# Altium PCB final.PcbDoc
Units mm, origin at the board's own origin, x right, y up, seen from the top; angles counter-clockwise.
Board outline 152.4 x 101.6 mm, 2 copper layers (Top Layer, Bottom Layer); 11 components, 17 nets, 65 pads, 0 vias.
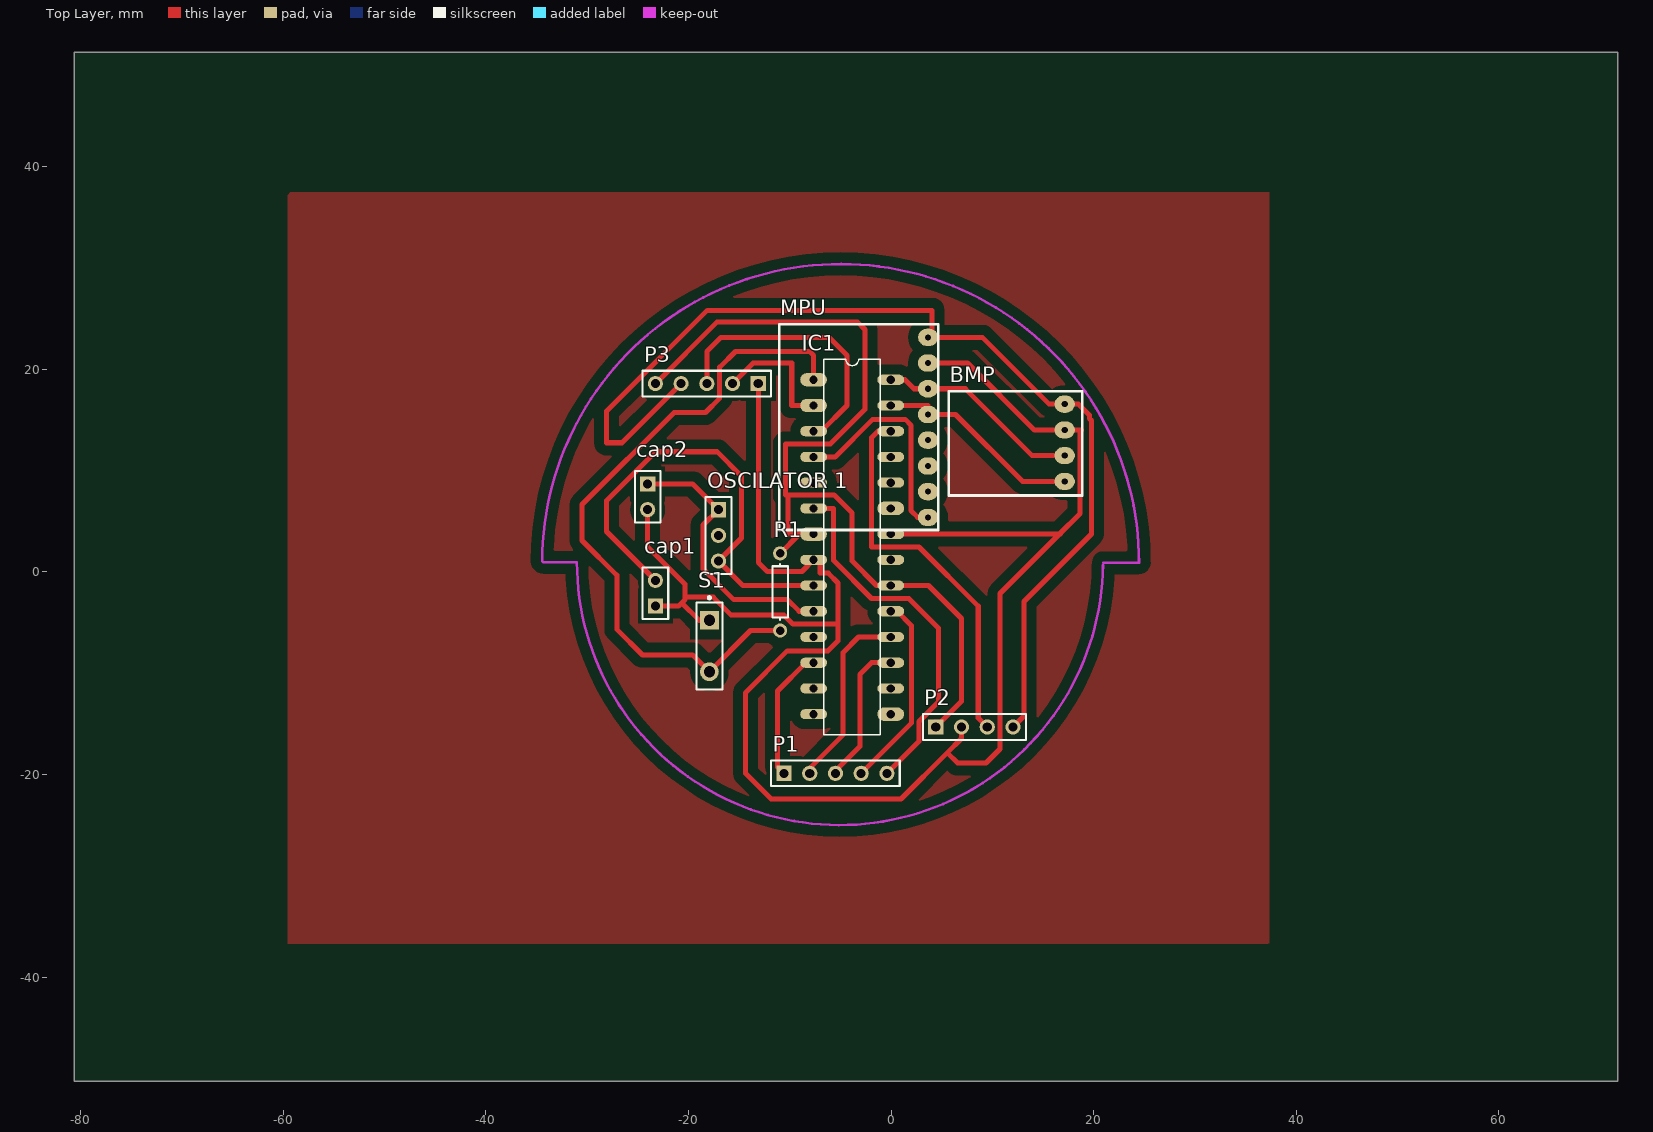
[diagram p0: Top Layer view]
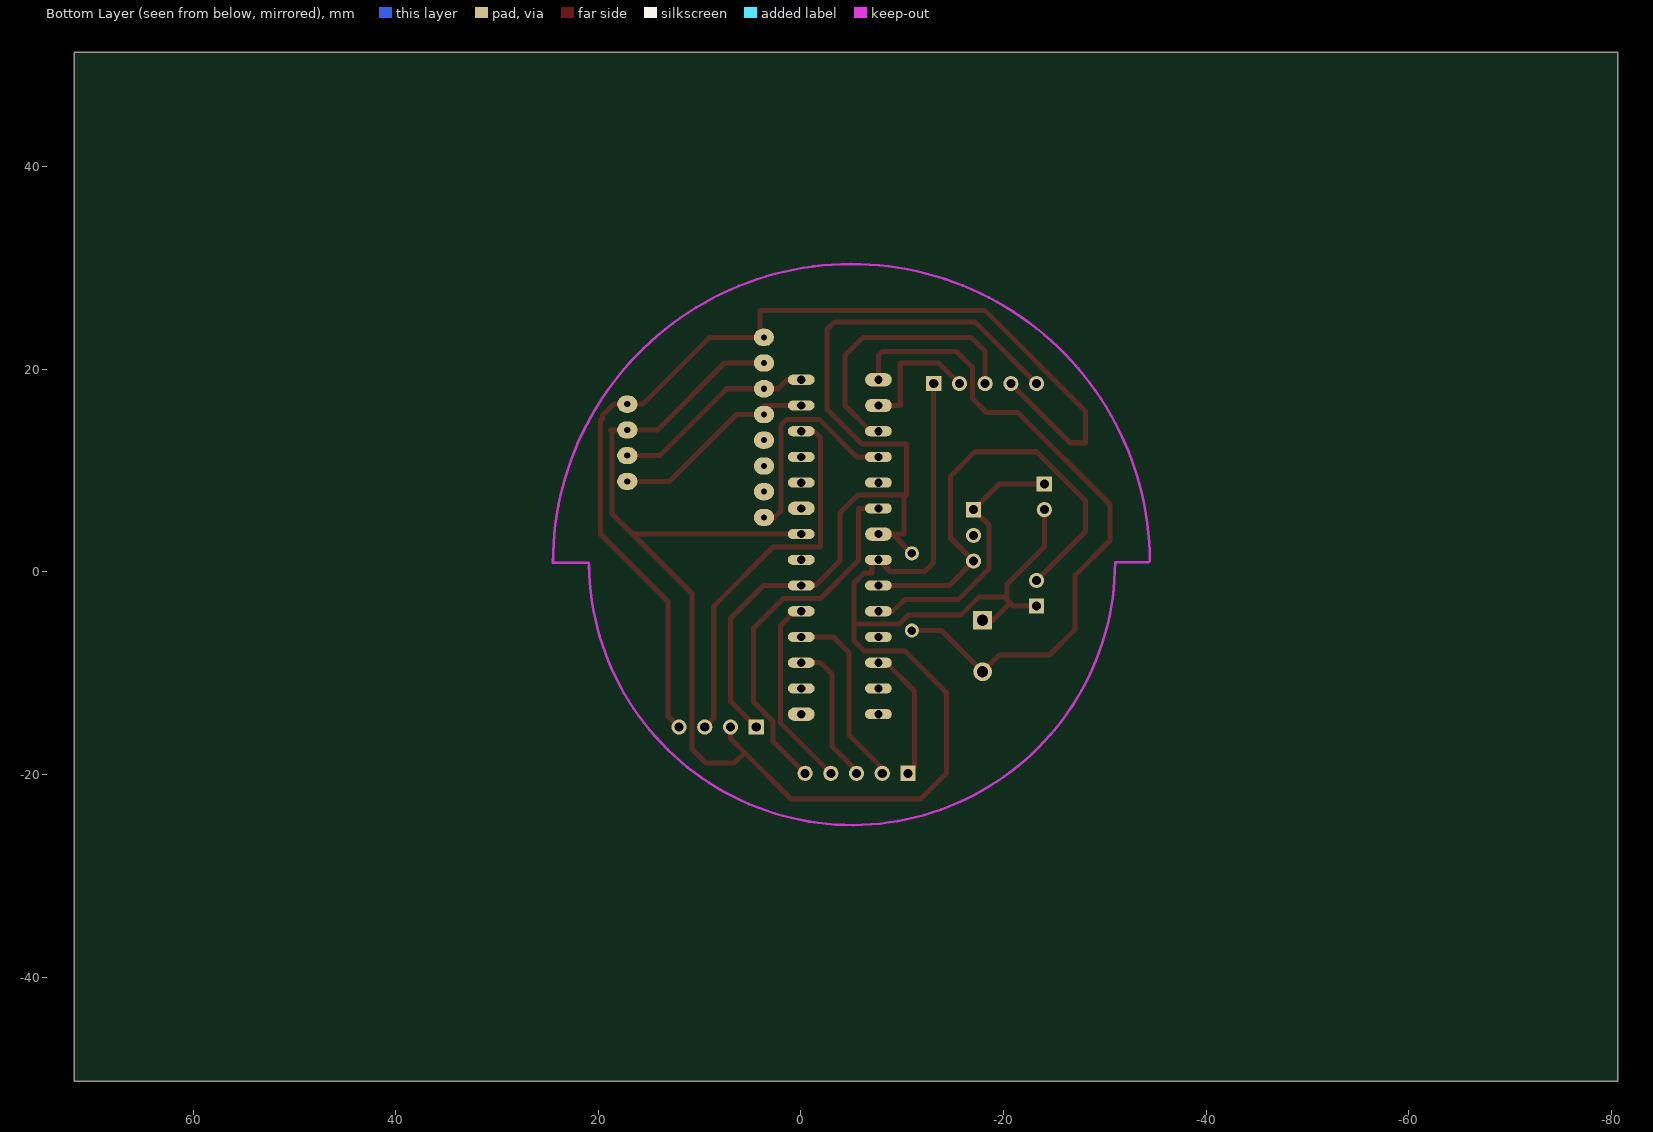
[diagram p1: Bottom Layer view, seen from below]

## Layer stack, top to bottom
Top Solder: solder mask 0.0102, Solder Resist, Dk 3.5
Top Layer: signal copper 0.0356
Dielectric 1: dielectric 0.32, FR-4, Dk 4.8
Bottom Layer: signal copper 0.0356
Bottom Solder: solder mask 0.0102, Solder Resist, Dk 3.5

## Board outline
-80.645,-50.292 71.755,-50.292 71.755,51.308 -80.645,51.308

## Design rules (kind name [scope] priority, off if disabled: settings)
Clearance [All] p1: gap=0.254 ignorepadtopadclearanceinfootprint=FALSE except(0: Arc-Hole Track-Hole SMDPad-Hole THPad-Hole Via-Hole Fill-Hole Poly-Hole Region-Hole Text-Hole; 1: Arc-Fill Arc-Poly Arc-Region Track-Fill Track-Poly Track-Region SMDPad-Fill SMDPad-Poly SMDPad-Region THPad-Fill THPad-Poly THPad-Region Via-Fill Via-Poly Via-Region Fill-Fill Fill-Poly Fill-Region Poly-Poly Poly-Region Region-Region)
PolygonConnect [All] p1: connectstyle=Relief reliefconductorwidth=0.254 reliefentries=4 polygonreliefangle="90 Angle" airgapwidth=0.254
RoutingLayers [All] p1: top layer_v5=TRUE bottom layer_v5=FALSE
RoutingVias [All] p1: holewidth=0.711 width=1.27 viastyle="Through Hole" minholewidth=0.711 minwidth=1.27 maxholewidth=0.711 maxwidth=1.27
SolderMaskExpansion [All] p1: expansion=0.102
Width [All] p1: maxlimit=0.7 minlimit=0.254 preferedwidth=0.5 toplayer_minwidth=0.5 bottomlayer_maxwidth=0.254 bottomlayer_prefwidth=0.254 minimp=50.000000 maximp=50.000000 favimp=50.000000
29 further rules are at their usual default settings.

## Classes and differential pairs
component class "MIDDLE LAYER": BMP cap1 cap2 MPU "OSCILATOR 1" P1 P2 P3 R1 S1

## Components (designator, comment, footprint, x,y, rotation, side; value= is the part's Value field where it differs from the comment)
BMP "BMP" BMP 12.294,12.751 r90 top
cap1 "Header 2" HDR1X2 -23.266,-3.378 r90 top
cap2 "Header 2" HDR1X2 -24.028,8.687 r270 top
IC1 "ATMEGA328-PU" *DIL28 -3.835,2.464 r0 top
MPU "MPU" MPU -11.042,24.435 r90 top
"OSCILATOR 1" "Header 3" HDR1X3 -17.043,6.147 r270 top
P1 "Header 5" HDR1X5 -10.566,-19.888 r0 top
P2 "Header 4" HDR1X4 4.42,-15.316 r0 top
P3 "Header 5" HDR1X5 -13.106,18.593 r180 top
R1 "Res1" AXIAL-0.3 -10.947,-1.981 r90 top value=1K
S1 "SW-PB" SPST-2 -17.932,-7.315 r270 top

## Footprints (in the part's own frame and the unit in brackets; to place one, negate y for a bottom-side part, rotate by r counter-clockwise, add the part's x,y. Pads: shape width x height; smd on the part's side, far side on the other; paste and mask are expansions set on the pad)
*DIL28 [mil]
  oval 104x52 hole 32: 1(-150,650) 2(-150,550) 7(-150,50) 15(150,-650) 23(150,150)
  oval 104x39.37 hole 32: 3(-150,450) 4(-150,350) 5(-150,250) 6(-150,150) 8(-150,-50) 9(-150,-150) 10(-150,-250) 11(-150,-350) 12(-150,-450) 13(-150,-550) 14(-150,-650) 16(150,-550) 17(150,-450) 18(150,-350) 19(150,-250) 20(150,-150) 21(150,-50) 22(150,50) 24(150,250) 25(150,350) 26(150,450) 27(150,550) 28(150,650)
  silkscreen extent -110,-730 110,730
AXIAL-0.3 [mm] "Axial Device, Thru-Hole; 2 Leads; 0.3 in Pin Spacing"
  round 1.4 hole 0.85: 1(-3.81,0) 2(3.81,0)
  silkscreen extent -2.77,-0.76 2.77,0.76
BMP [mm]
  oval 1.7x2 hole 0.6: 28(-3.81,-4.858) 29(-1.27,-4.858) 30(1.27,-4.858) 31(3.81,-4.858)
  silkscreen extent -5.21,-6.6 5.09,6.6
HDR1X2 [mm] "Connector; Header; 2 Position"
  rect 1.5x1.5 hole 0.9: 1(0,0)
  round 1.5 hole 0.9: 2(2.54,0)
  silkscreen extent -1.27,-1.27 3.81,1.27
HDR1X3 [mm] "Connector; Header; 3 Position"
  rect 1.5x1.5 hole 0.9: 1(0,0)
  round 1.5 hole 0.9: 2(2.54,0) 3(5.08,0)
  silkscreen extent -1.27,-1.27 6.35,1.27
HDR1X4 [mm] "Connector; Header; 4 Position"
  rect 1.5x1.5 hole 0.9: 1(0,0)
  round 1.5 hole 0.9: 2(2.54,0) 3(5.08,0) 4(7.62,0)
  silkscreen extent -1.27,-1.27 8.89,1.27
HDR1X5 [mm] "Connector; Header; 5 Position"
  rect 1.5x1.5 hole 0.9: 1(0,0)
  round 1.5 hole 0.9: 2(2.54,0) 3(5.08,0) 4(7.62,0) 5(10.16,0)
  silkscreen extent -1.27,-1.27 11.43,1.27
MPU [mm]
  oval 1.7x2 hole 0.6: 1(-19.05,-14.7) 2(-16.51,-14.7) 3(-13.97,-14.7) 4(-11.43,-14.7) 5(-8.89,-14.7) 6(-6.35,-14.7) 7(-3.81,-14.7) 8(-1.27,-14.71)
  silkscreen extent -20.3,-15.7 0,0
SPST-2 [mm] "Switch; 2 Leads"
  rect 1.85x1.85 hole 1.1: 1(-2.54,0)
  round 1.85 hole 1.1: 2(2.54,0)
  silkscreen extent -4.89,-1.27 4.28,1.27

## Part data
cap1 cap2: "Header, 2-Pin", LatestRevisionDate=17-Jul-2002, LatestRevisionNote="Re-released for DXP Platform.", Publisher="Altium Limited"
IC1: "ATmega Series 20 MHz 32 KB Flash 2 KB SRAM 8-Bit Microcontroller - DIP-28", Package="PDIP-28 Microchip", Availability=Unavailable, MF=Microchip, MP=ATMEGA328-PU, Price=None, SnapEDA_Link=https://www.snapeda.com/parts/ATMEGA328-PU/Microchip/view-part/?ref=snap
"OSCILATOR 1": "Header, 3-Pin", LatestRevisionDate=17-Jul-2002, LatestRevisionNote="Re-released for DXP Platform.", Publisher="Altium Limited"
P1 P3: "Header, 5-Pin", LatestRevisionDate=17-Jul-2002, LatestRevisionNote="Re-released for DXP Platform.", Publisher="Altium Limited"
P2: "Header, 4-Pin", LatestRevisionDate=17-Jul-2002, LatestRevisionNote="Re-released for DXP Platform.", Publisher="Altium Limited"
R1: "Resistor", LatestRevisionDate=17-Jul-2002, LatestRevisionNote="Re-released for DXP Platform.", PackageDescription="Axial Device, Thru-Hole; 2 Leads; 0.3 in Pin Spacing", PackageReference=AXIAL-0.3, Published=8-Jun-2000, Publisher="Altium Limited"
S1: "Switch", LatestRevisionDate=17-Jul-2002, LatestRevisionNote="Re-released for DXP Platform.", PackageDescription="Switch; 2 Leads", PackageReference=SPST-2, Published=24-Mar-1999, Publisher="Altium Limited"

## Nets (pads, with @x,y where several pads share a name; then routed paths per layer and width w, separated by ;. In a path a pad name is that pad's centre, name@x,y a point inside that pad or via, vN(x,y) a via of type N, cw(c..) or ccw(c..) an arc to the next point about the centre after c; other vN are vias at no path point)
NetBMP_28: BMP.28 IC1.27 MPU.5 | length 20.8
  Top Layer w0.5: IC1.27 3.658,16.434 MPU.5 6.375,15.545 12.979,8.941 BMP.28
NetBMP_29: BMP.29 IC1.28 MPU.6 | length 20.3
  Top Layer w0.5: IC1.28 1.372,18.974 2.261,18.085 MPU.6 7.341,18.085 13.945,11.481 BMP.29
NetBMP_30: BMP.30 cap1.1 cap2.2 IC1.8 IC1.22 MPU.7 P2.2 P3.1 S1.1 | length 188
  Top Layer w0.5: cap2.2 -24.028,2.464 -20.345,-1.219 -20.345,-2.489 ; cap1.1 -20.98,-3.378 -20.663,-3.061 ; S1.1 -18.948,-4.775 -20.663,-3.061 ; P3.1 -13.106,0.94 -12.217,0.051 -8.788,0.051 IC1.8 -6.985,1.194 -6.985,-0.127 -6.198,-0.127 -5.232,-1.092 -5.232,-5.156 ; IC1.22 16.637,3.734 ; MPU.7 7.544,20.625 14.148,14.021 BMP.30 18.821,14.021 18.644,13.843 18.644,12.054 18.656,12.042 18.656,10.92 18.644,10.908 18.644,9.514 18.656,9.502 18.656,5.752 16.637,3.734 ; P2.2 6.96,-16.459 5.563,-17.856 ; 16.739,3.734 16.637,3.734 ; -20.663,-3.061 -20.345,-2.743 -20.345,-2.489 ; -20.345,-2.489 -17.551,-2.489 -15.773,-4.267 -10.566,-4.267 -9.677,-5.156 -5.232,-5.156 ; -5.232,-5.156 -5.232,-6.807 -6.223,-7.798 -10.236,-7.798 -14.376,-11.938 -14.376,-19.888 -11.836,-22.428 0.991,-22.428 5.563,-17.856 ; 5.563,-17.856 6.579,-18.872 9.373,-18.872 10.77,-17.475 10.77,-2.134 16.637,3.734
NetBMP_31: BMP.31 MPU.8 P2.4 P3.4 | length 105.2
  Top Layer w0.5: P3.4 -26.568,12.751 -28.092,12.751 -28.092,15.875 -18.136,25.832 4.044,25.832 4.044,23.542 MPU.8 9.013,23.165 15.617,16.561 BMP.31 18.517,16.561 19.603,15.474 19.603,15.134 19.787,14.951 19.787,3.734 13.132,-2.921 13.132,-14.224 P2.4
Netcap1_2: "OSCILATOR 1.3" cap1.2 IC1.9 | length 45.9
  Top Layer w0.5: cap1.2 -28.092,3.988 -28.092,7.036 -23.266,11.862 -17.17,11.862 -14.757,9.449 -14.757,3.353 -17.043,1.067 -14.63,-1.346 IC1.9
Netcap2_1: "OSCILATOR 1.1" cap2.1 IC1.10 | length 27.2
  Top Layer w0.5: cap2.1 -19.583,8.687 -17.043,6.147 -18.567,4.623 -18.567,0.305 -15.519,-2.743 -10.211,-2.743 -9.068,-3.886 IC1.10
NetIC1_1: IC1.1 R1.1 S1.2 | length 66.8
  Top Layer w0.5: R1.1 -13.868,-5.791 S1.2 -19.583,-8.204 -24.536,-8.204 -27.076,-5.664 -27.076,-0.33 -30.505,3.099 -30.505,6.655 -21.412,15.748 -18.313,15.748 -16.916,17.145 -16.916,20.218 -15.367,21.768 -8.026,21.768 -7.645,21.387 IC1.1
NetIC1_2: IC1.2 P3.2 | length 13
  Top Layer w0.5: P3.2 -13.614,20.625 -9.804,20.625 -9.804,16.434 IC1.2
NetIC1_3: IC1.3 P3.3 | length 27.6
  Top Layer w0.5: P3.3 -18.186,21.768 -16.789,23.165 -6.121,23.165 -4.343,21.387 -4.343,16.434 -6.883,13.894 IC1.3
NetIC1_4: IC1.4 MPU.1 | length 21.8
  Top Layer w0.5: IC1.4 -5.512,11.354 -1.803,15.062 1.397,15.062 1.981,14.478 1.981,6.045 2.642,5.385 MPU.1
NetIC1_6: IC1.6 P1.5 | length 36.7
  Top Layer w0.5: IC1.6 -5.664,6.274 -5.664,1.118 -1.93,-2.616 1.753,-2.616 4.674,-5.537 4.674,-12.849 2.761,-14.762 2.761,-16.721 P1.5
NetIC1_7: IC1.7 IC1.20 P2.1 P3.5 R1.2 | length 92.6
  Top Layer w0.5: P3.5 -17.17,24.689 -3.327,24.689 -2.565,23.927 -2.565,16.053 -5.994,12.624 -10.439,12.624 -10.439,7.595 -10.185,7.595 ; R1.2 -9.042,3.734 ; IC1.7 -9.042,3.734 ; P2.1 P2.1@4.92,-14.816 ; P2.1@4.42,-15.066 4.42,-14.816 4.67,-14.816 P2.1@4.92,-14.816 ; -10.185,7.595 -5.613,7.595 -3.835,5.817 -3.835,1.067 -1.422,-1.346 IC1.20 3.708,-1.346 6.96,-4.597 6.96,-12.776 P2.1@4.92,-14.816 ; -10.185,7.595 -10.185,3.734 -9.042,3.734
NetIC1_12: IC1.12 P1.1 | length 13.1
  Top Layer w0.5: P1.1 -11.201,-19.253 -11.201,-11.76 -8.407,-8.966 IC1.12
NetIC1_17: IC1.17 P1.3 | length 14.3
  Top Layer w0.5: P1.3 -5.486,-19.634 -3.073,-17.221 -3.073,-10.109 -1.93,-8.966 IC1.17
NetIC1_18: IC1.18 P1.2 | length 18.6
  Top Layer w0.5: P1.2 -8.026,-19.38 -4.724,-16.078 -4.724,-7.95 -3.2,-6.426 IC1.18
NetIC1_19: IC1.19 P1.4 | length 19.3
  Top Layer w0.5: P1.4 2.007,-14.935 2.007,-5.283 0.61,-3.886 IC1.19
NetIC1_26: IC1.26 P2.3 | length 38.2
  Top Layer w0.5: IC1.26 -1.295,13.894 -1.93,13.259 -1.93,2.464 2.769,2.464 8.611,-3.378 8.611,-14.427 P2.3
pads on no net: "OSCILATOR 1.2" IC1.5 IC1.11 IC1.13 IC1.14 IC1.15 IC1.16 IC1.21 IC1.23 IC1.24 IC1.25 MPU.2 MPU.3 MPU.4

## Polygon pours and split planes (outlines as drawn)
no net on Top Layer (solid, pour order 32): 37.846,-36.83
no net on Top Layer (solid, pour order 30): 37.338,37.465 -59.309,37.465 -59.563,37.211 -59.563,-36.703 37.211,-36.703 37.338,-36.83
no net on Top Layer (solid, pour order 24): -1.016,-13.081
no net on Top Layer "Top Layer-No Net" (solid, pour order 14): 11.176,-82.677

## Keep-outs
Keep-Out Layer:
  lines w0.254: -34.442,1.049 cw(c-4.978,0.94) 24.486,0.922 20.947,0.922 ; -34.345,0.953 -31.012,0.953 ccw(c-5.04,0.975) 20.93,0.686